# Altium PCB Current_Regulation.PcbDoc
Units mil, origin at the board's own origin, x right, y up, seen from the top; angles counter-clockwise.
Board outline 2283.46 x 2913.39 mil, 2 copper layers (Top Layer, Bottom Layer); 16 components, 23 nets, 55 pads, 2 vias.
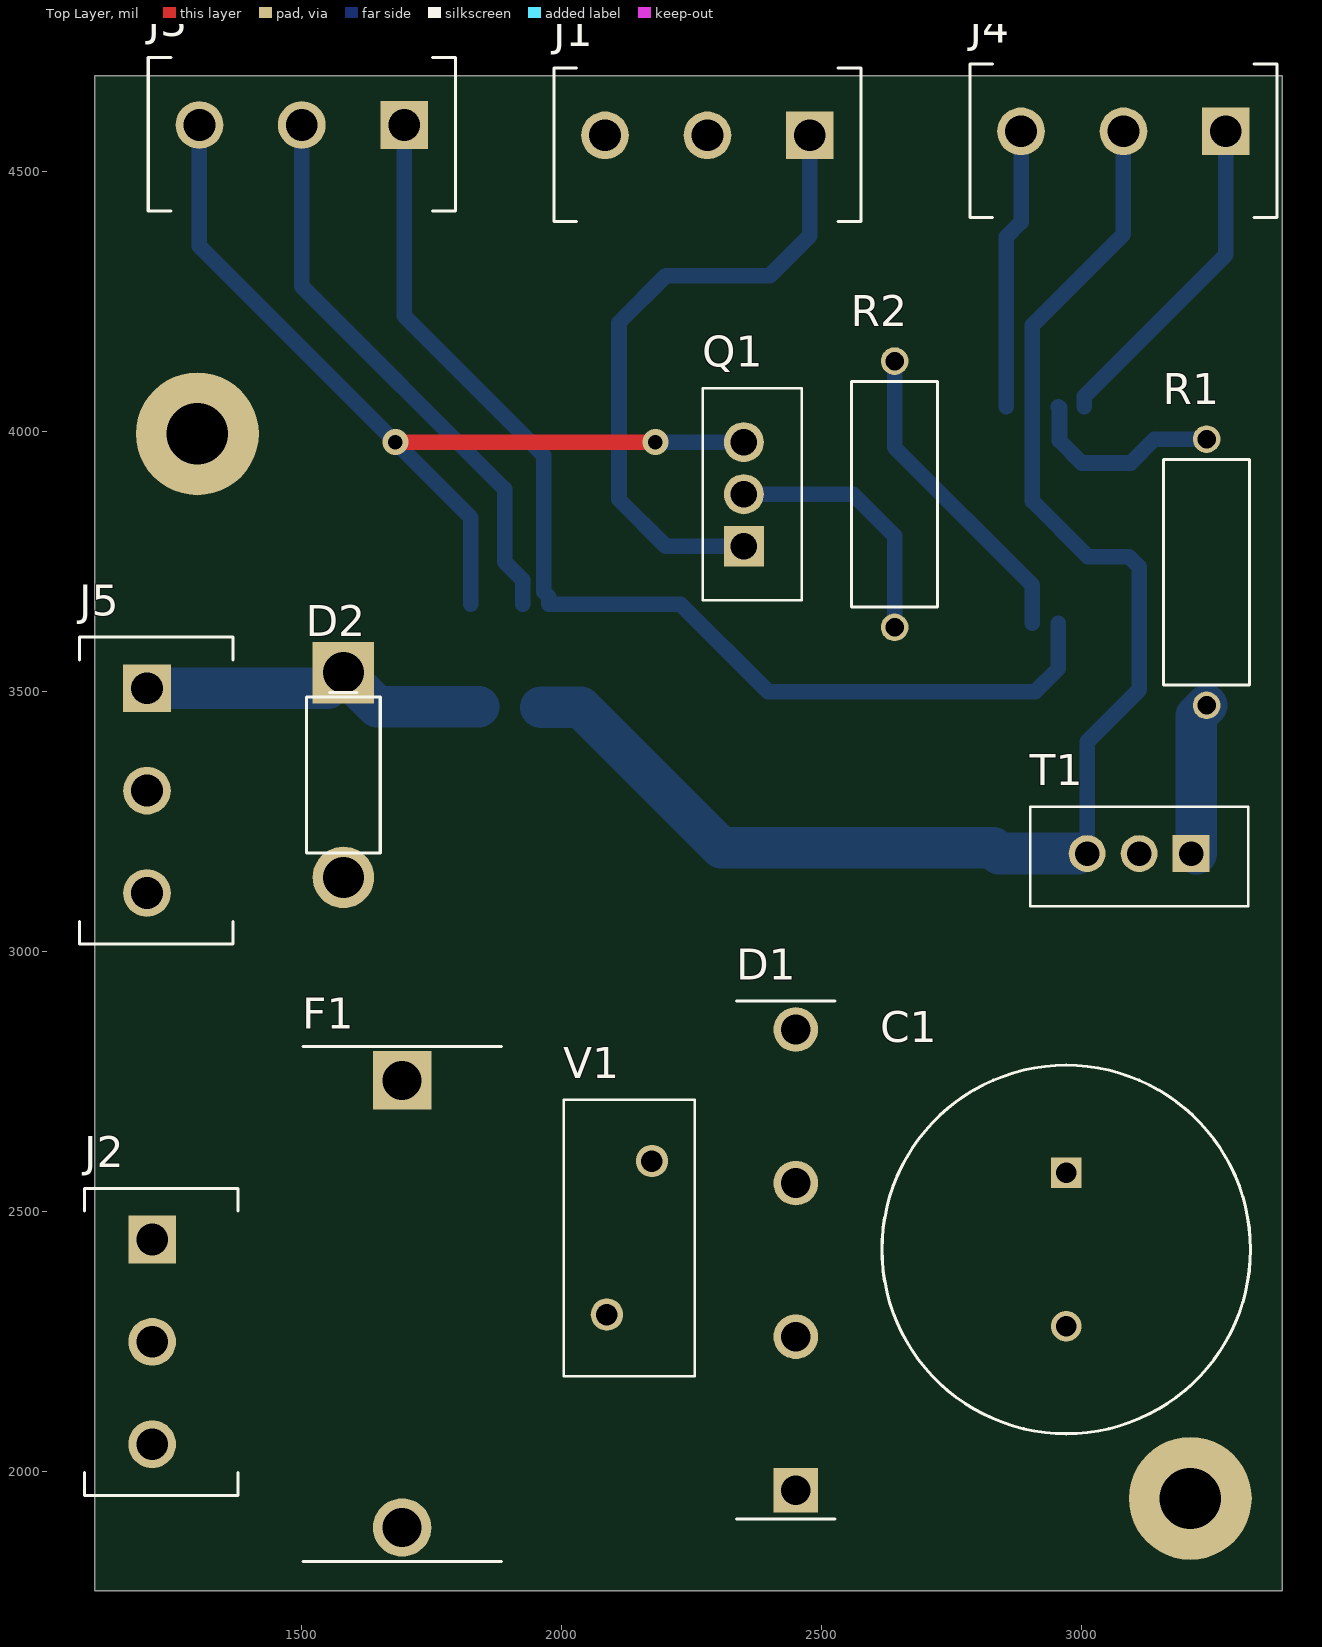
[diagram p0: Top Layer view]
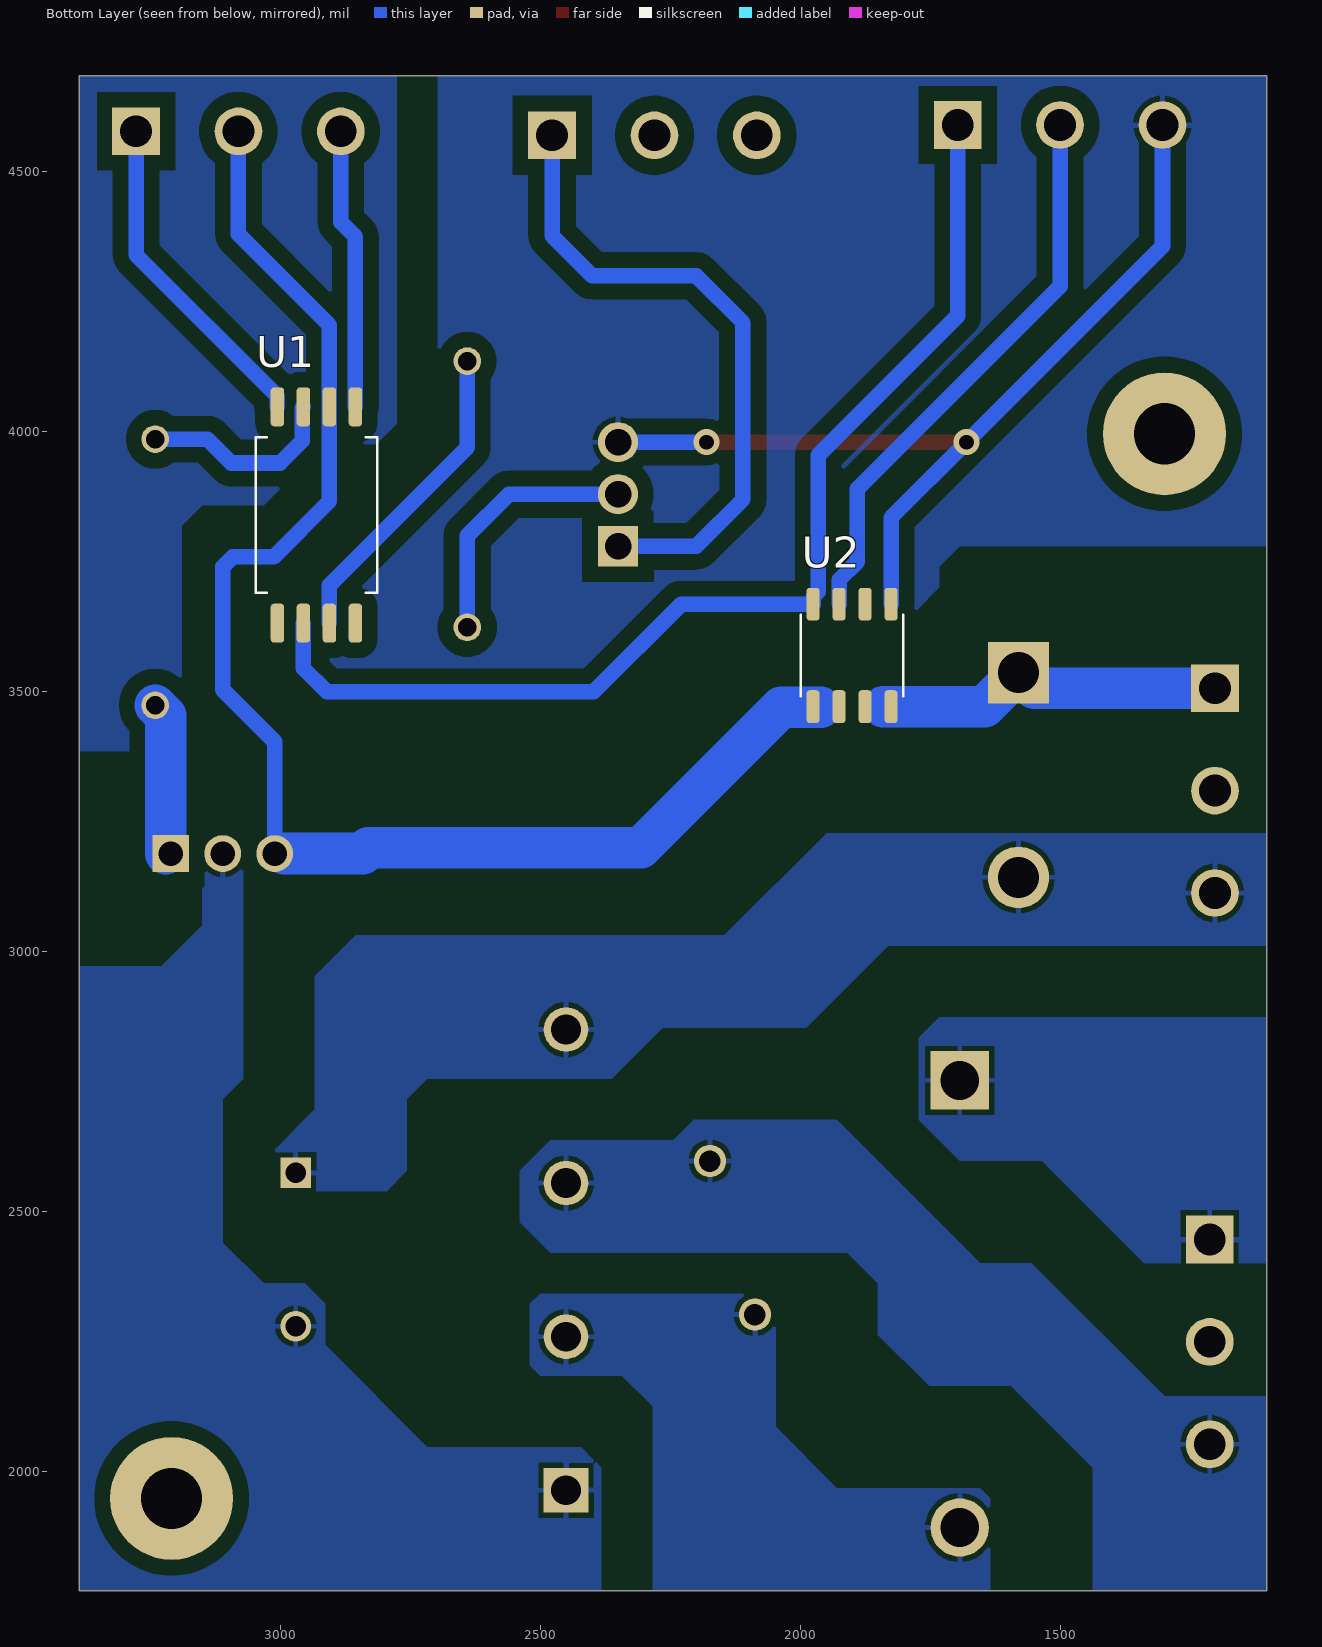
[diagram p1: Bottom Layer view, seen from below]
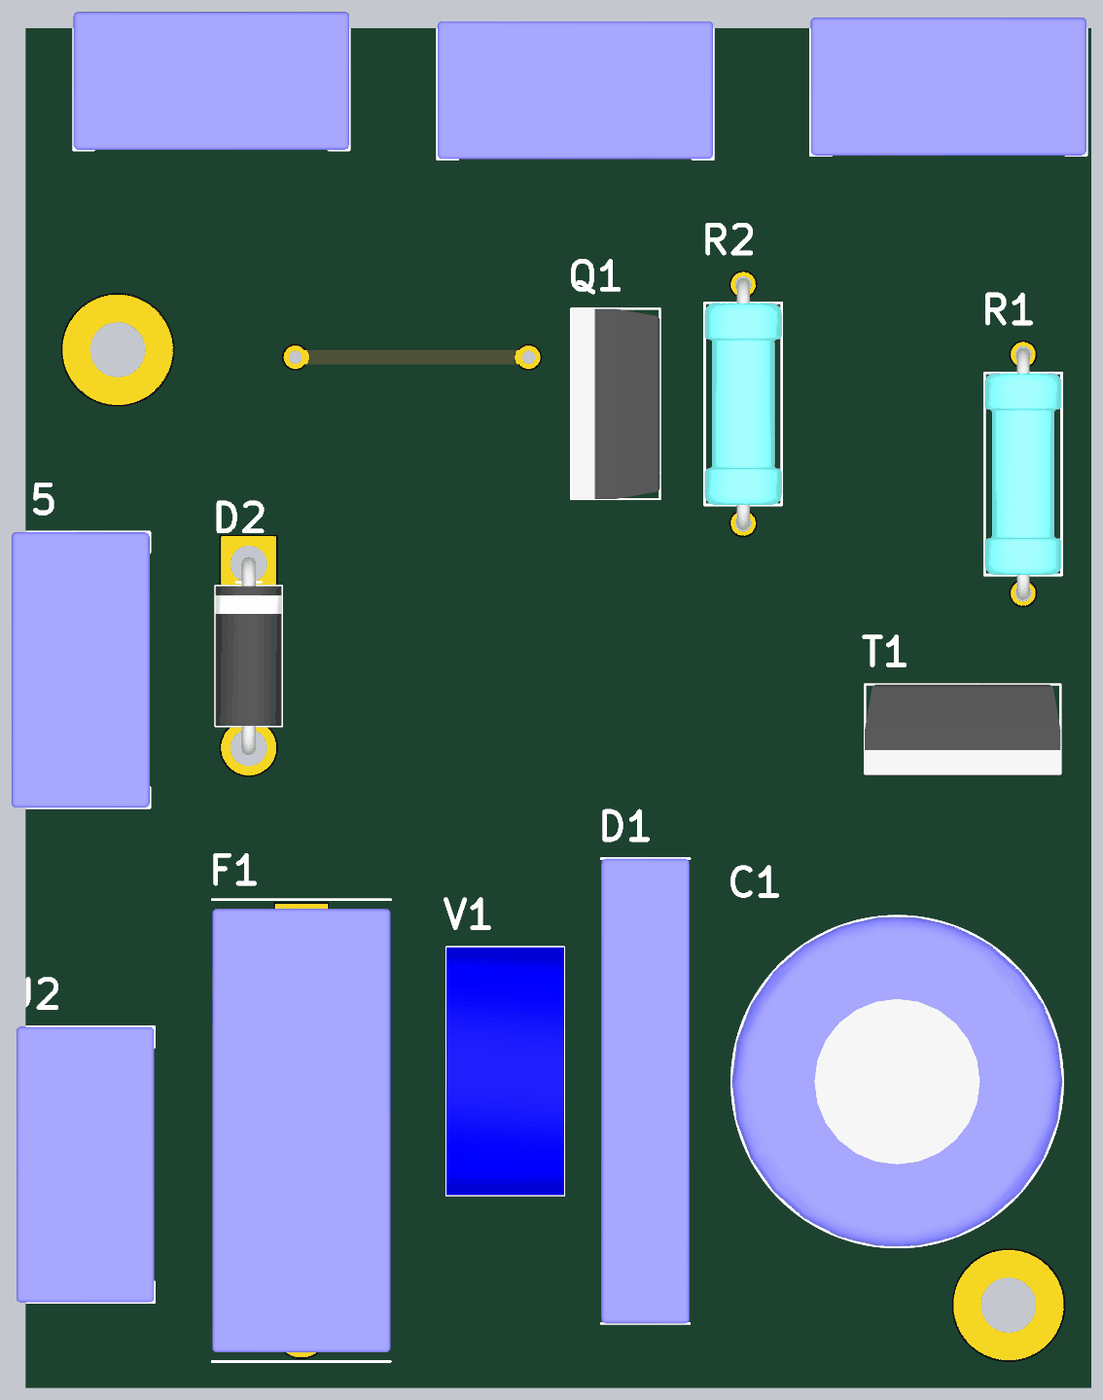
[diagram p2: 3D render of the assembled board from above, using the file's embedded part models]

## Layer stack, top to bottom
Top Solder: solder mask 0.4, Solder Resist, Dk 3.5
Top Layer: signal copper 1.4
Dielectric 1: dielectric 12.6, FR-4, Dk 4.8
Bottom Layer: signal copper 1.4
Bottom Solder: solder mask 0.4, Solder Resist, Dk 3.5

## Board outline
1102.36,1771.65 1102.36,4685.04 3385.83,4685.04 3385.83,1771.65

## Design rules (kind name [scope] priority, off if disabled: settings)
Clearance [All] p1: gap=30 ignorepadtopadclearanceinfootprint=FALSE except(0: Arc-Hole Track-Hole SMDPad-Hole THPad-Hole Via-Hole Text-Hole; 10: Arc-Arc Arc-Track Arc-SMDPad Arc-THPad Arc-Via Arc-Text Track-Track Track-SMDPad Track-THPad Track-Via Track-Text SMDPad-SMDPad SMDPad-THPad SMDPad-Via SMDPad-Text THPad-THPad THPad-Via THPad-Text Via-Via Via-Text Text-Text)
PolygonConnect [All] p1: connectstyle=Relief reliefconductorwidth=10 reliefentries=4 polygonreliefangle="90 Angle" airgapwidth=10
RoutingVias [All] p1: holewidth=28 width=50 viastyle="Through Hole" minholewidth=28 minwidth=50 maxholewidth=28 maxwidth=50
SolderMaskExpansion [All] p1: expansion=4 istentingtop=FALSE
Width [All] p1: maxlimit=80 minlimit=7 preferedwidth=10
30 further rules are at their usual default settings.

## Classes and differential pairs
component class Simulation: C2 D3 D? L1 M1 R3 V2 V3

## Components (designator, comment, footprint, x,y, rotation, side; value= is the part's Value field where it differs from the comment)
C1 "Capacitor-P" C-P-400V 2970,2427.64 r270 top value=47uF
D1 "KBJ2010_T0_00601" SIP480W100P750L2530H1340Q4 2430.32,2407.64 r90 top
D2 "Diode" Diode-6A 1580,3340 r270 top
F1 "Fuse" FuseHolder 1692.91,2322.83 r270 top value="Fuse holder"
J1 "Molex Micro-Latch" ScrewTerminal 2280,4552.28 r180 top
J2 "Molex Micro-Latch" ScrewTerminal 1230,2250 r270 top
J3 "Molex Micro-Latch" ScrewTerminal 1500,4572.28 r180 top
J4 "Molex Micro-Latch" ScrewTerminal 3080,4560 r180 top
J5 "Molex Micro-Latch" ScrewTerminal 1220,3310 r270 top
Q1 "=Value" MOSFET 2350,3780 r90 top
R1 "1k" R-2W 3240,3730 r90 top
R2 "120Ohm" R-2W 2640,3880 r270 top
T1 "IKA08N65ET6XKSA1" TO254P1065X485X2200-3 3210.24,3188.98 r180 top
U1 "UCC23514EDWVR" SOIC8P127_585X1150X280L75X41N 2930,3840 r180 bottom
U2 "TMCS1108A3BQDT" SOIC8P127_490X599X200L104X41N 1900,3570 r180 bottom
V1 "Varistor" VARRBO750W80L1350T640H1650 2130,2450 r270 top

## Footprints (in the part's own frame and the unit in brackets; to place one, negate y for a bottom-side part, rotate by r counter-clockwise, add the part's x,y. Pads: shape width x height; smd on the part's side, far side on the other; paste and mask are expansions set on the pad)
C-P-400V [mm] "Capacitor, Polarized, Radial (Electrolytic); 7.50 mm Pitch X 18.00 mm Dia X 20.00 mm H body"
  rect 1.5x1.5 / inner round 1.5 / far side rect 1.5x1.5 hole 1 paste-1.5: 1(-3.75,0)
  round 1.5 hole 1 paste-1.5: 2(3.75,0)
  silkscreen extent -9,-9 9,9, body extent -9,-9 9.01,9, height 20.01
Diode-6A [mm] "Diode, Axial; 10.00 mm Pitch X 0.75 mm W 7.60 mm L X 5.00 mm Dia. body"
  round 3 hole 2 paste-1.5: A(5,0)
  rect 3x3 / inner round 3 / far side rect 3x3 hole 2 paste-1.5: C(-5,0)
  silkscreen extent -4.03,-1.8 3.8,1.8, body extent -5.38,-1.81 5.38,1.81, height 5.01
FuseHolder [mm] "SIP, 21.84 mm pitch; 2 pin, 24.16 mm L X 9.70 mm W X 11.00 mm H body"
  rect 2.85x2.85 / inner round 2.85 / far side rect 2.85x2.85 hole 1.9 paste-2.85: 1(-10.92,0)
  round 2.85 hole 1.9 paste-2.85: 2(10.92,0)
  silkscreen extent -12.57,-4.85 12.57,4.85, body extent -12.08,-4.85 12.08,4.85, height 11
MOSFET [mm] "Flange Mount (TO) Vertical, 2.54 mm pitch; 3 pin, 10.36 mm W X 4.83 mm H X 19.65 mm mounted height"
  rect 1.96x1.96 / inner round 1.96 / far side rect 1.96x1.96 hole 1.3 paste-1.96: 1(0,0)
  round 1.96 hole 1.3 paste-1.96: 2(2.54,0) 3(5.08,0)
  silkscreen extent -2.64,-2.83 7.72,2, body extent -2.64,-2.83 7.72,2, height 19.65
R-2W [mm] "Resistor, Axial; 13.00 mm Pitch X 0.70 mm W 11.00 mm L X 6.00 mm Dia. body"
  round 1.35 hole 0.9 paste-1.35: 1(-6.5,0) 2(6.5,0)
  silkscreen extent -5.5,-2.1 5.5,2.1, body extent -6.85,-2.1 6.85,2.1, height 6
ScrewTerminal [mm] "SIP, 5.00 mm pitch; 3 pin, 15.00 mm L X 7.50 mm W X 10.00 mm H body"
  rect 2.33x2.33 / inner round 2.33 / far side rect 2.33x2.33 hole 1.55 paste-2.33: 1(-5,-0.45)
  round 2.33 hole 1.55 paste-2.33: 2(0,-0.45) 3(5,-0.45)
  silkscreen extent -7.5,-3.75 7.5,3.75, body extent -7.5,-3.75 7.5,3.75, height 10
SIP480W100P750L2530H1340Q4 [mm] "SIP, 7.50 mm pitch; 4 pin, 25.30 mm L X 4.80 mm W X 13.40 mm H body"
  rect 2.18x2.18 / inner round 2.18 / far side rect 2.18x2.18 hole 1.45 paste-2.18: 1(-11.25,-0.5)
  round 2.18 hole 1.45 paste-2.18: 2(11.25,-0.5) 3(-3.75,-0.5) 4(3.75,-0.5)
  silkscreen extent -12.65,-2.4 12.65,2.4, body extent -12.65,-2.4 12.65,2.4, height 13.4
SOIC8P127_490X599X200L104X41N [mil] "Small Outline IC (SOIC), 1.27 mm pitch; 8 pin, 4.905 mm L X 3.895 mm W X 2.00 mm H body"
  rrect50% 25.16x63.03 smd: 1(-75,-98.5) 2(-25,-98.5) 3(25,-98.5) 4(75,-98.5) 5(75,98.5) 6(25,98.5) 7(-25,98.5) 8(-75,98.5)
  silkscreen extent -98,-78 98,78, body extent -97,-118 97,118, height 79
SOIC8P127_585X1150X280L75X41N [mil] "Small Outline IC (SOIC), 1.27 mm pitch; 8 pin, 5.85 mm L X 7.50 mm W X 2.80 mm H body"
  rrect50% 25.94x74.84 smd: 1(-75,-207.91) 2(-25,-207.91) 3(25,-207.91) 4(75,-207.91) 5(75,207.91) 6(25,207.91) 7(-25,207.91) 8(-75,207.91)
  silkscreen extent -117,-150 117,150, body extent -115,-226 115,226, height 110
TO254P1065X485X2200-3 [mm] "Flange Mount (TO) Vertical, 2.54 mm pitch; 3 pin, 10.65 mm W X 4.85 mm H X 22.00 mm mounted height"
  rect 1.8x1.8 / inner round 1.8 / far side rect 1.8x1.8 hole 1.2 paste-1.8: 1(0,0)
  round 1.8 hole 1.2 paste-1.8: 2(2.54,0) 3(5.08,0)
  silkscreen extent -2.79,-2.28 7.87,2.57, body extent -2.79,-2.28 7.87,2.57, height 22
VARRBO750W80L1350T640H1650 [mm] "Varistor, Radial (Disk with Offset Leads), 7.50 mm Pitch X 0.80 mm W X 13.50 mm L X 6.40 mm T X 16.50 mm H body"
  round 1.58 hole 1.05 paste-1.58: 1(-3.75,1.1) 2(3.75,-1.1)
  silkscreen extent -6.75,-3.2 6.75,3.2, body extent -6.75,-3.2 6.75,3.2, height 16.5

## Part data
D1: Diode Case Style=KBJ-2, Forward Current=20A, Max Reverse Voltage=1kV, Supplier Part Number=241-KBJ2010_T0_00601, ComponentLinkDescription=Datasheet, ComponentLinkURL=https://hr.mouser.com/datasheet/2/1057/KBJ2010-2999227.pdf, Diode Type="Bridge rectifier", FR_SN=D-07, Manufacturer Part Number=KBJ2010_T0_00601, Part Number=KBJ2010_T0_00601, Reverse Recovery Time=-
F1: library part F_30A, FR_SN=F-04, Part Number=F_30A
J1 J2 J3 J4 J5: library part "Molex Micro-Latch 1x3", Manufacturer Part Number=53254-0370, Supplier Part Number=538-53254-0370, ComponentLinkDescription=Datasheet, ComponentLinkURL=https://hr.mouser.com/datasheet/2/276/0532540370_PCB_HEADERS-171041.pdf, FR_SN=J-13, Part Number="Molex Micro-Latch 1x3"
Q1: library part MOSFET
R1 R2: library part Resistor
T1: Continuous Drain Current Id="11 A", Drain Source Voltage Uds="1.5 V", On Resistance Rds(on)=-, Power Dissipation Pd="33 W", Supplier Part Number=726-IKA08N65ET6XKSA1, Transistor Case Style=TO-220FP-3, ComponentLinkDescription=Datasheet, ComponentLinkURL=https://hr.mouser.com/datasheet/2/196/Infineon_IKA08N65ET6_DataSheet_v01_00_EN-1731522.pdf, FR_SN=T_M-16, Manufacturer Part Number=IKA08N65ET6XKSA1, Part Number=IKA08N65ET6XKSA1
U1: IC Case Style=SOIC-8, Supplier Part Number=595-UCC23514EDWVR, Category="MOSFET/IGBT gate driver", ComponentLinkDescription=Datasheet, ComponentLinkURL=https://www.ti.com/general/docs/suppproductinfo.tsp?distId=26&gotoUrl=https://www.ti.com/lit/gpn/ucc23514, FR_SN=IC_D-18, Manufacturer Part Number=UCC23514EDWVR, Part Number=UCC23514EDWVR
U2: IC Case Style=SOIC-8, Supplier Part Number=595-TMCS1108A3BQDT, Category="Current Sensor", ComponentLinkDescription=Datasheet, ComponentLinkURL=www.ti.com/lit/ds/symlink/tmcs1108.pdf?HQS=dis-mous-null-mousermode-dsf-pf-null-wwe&ts=1664483891528&ref_url=https%253A%252F%252Fpt.mouser.com%252F, FR_SN=U_Analog-21, Manufacturer Part Number=TMCS1108A3BQDT, Part Number=TMCS1108A3BQDT
V1: library part B72314S2351K101, FR_SN=Var-01, Part Number=B72314S2351K101

## Free pads (board coordinates)
  round 236.22 hole 118.11: 1(1299.21,3996.06) 2(3208.66,1948.82)

## Via types
v1: diameter 50, hole 28, Top Layer to Bottom Layer, 2 vias

## Nets (pads, with @x,y where several pads share a name; then routed paths per layer and width w, separated by ;. In a path a pad name is that pad's centre, name@x,y a point inside that pad or via, vN(x,y) a via of type N, cw(c..) or ccw(c..) an arc to the next point about the centre after c; other vN are vias at no path point)
3V3: J3.1 U1.2 U2.8 | length 2192.2
  Bottom Layer w30: J3.1 1696.85,4223.15 1965,3955 1965,3692.6 1975,3682.6 U2.8 2228.5,3668.5 2397.01,3500 2910,3500 2955,3545 U1.2
+15V_IGBT: J4.1 U1.8 | length 642.4
  Bottom Layer w30: U1.8 3005,4068.31 3276.85,4340.16 J4.1
-8V_IGBT: J4.3 U1.5 | length 541.5
  Bottom Layer w30: U1.5 2855,4375 2883.15,4403.15 J4.3
CurrentSense: J3.2 U2.7 | length 1097.5
  Bottom Layer w30: J3.2 1500,4280 1890,3890 1890,3750 1925,3715 U2.7
GateControl: J1.1 Q1.1 | length 1246.4
  Bottom Layer w30: Q1.1 2200,3780 2110,3870 2110,4210 2200,4300 2400,4300 2476.85,4376.85 J1.1
GND: J3.3 Q1.3 U2.5 | length 1807.7
  Top Layer w30: v1(1680,3980) v1(2180,3980)
  Bottom Layer w30: J3.3 1303.15,4356.85 v1(1680,3980) 1825,3835 U2.5 ; v1(2180,3980) Q1.3
GND_HV: C1.1 D1.2 D2.A J5.3
GND_IGBT: J4.2 T1.3 U1.6 U2.1 U2.2 | length 2782.3
  Bottom Layer w30: T1.3 3010.24,3403.94 3110.24,3503.94 3110.24,3740.16 3090.55,3759.84 3011.81,3759.84 2905,3866.65 U1.6 2905,4205 3080,4380 J4.2
  Bottom Layer w80: 1960,3470 2036.5,3470 2306.5,3200 2830,3200 2841.02,3188.98 T1.3@2992.13,3188.98
Line: F1.1 J2.1
NetC1_2: C1.2 D1.1 T1.2
NetD1_3: D1.3 F1.2 V1.2
NetD2_C: D2.C J5.1 U2.3 U2.4 | length 677.2
  Bottom Layer w80: J5.1 1550,3506.85 D2.C 1645.35,3471.5 U2.4 1840,3471.5
NetD3_2: 
NetL1_2: 
NetM1_2: 
NetQ1_2: Q1.2 R2.2 | length 499
  Bottom Layer w30: Q1.2 2560,3880 2640,3800 R2.2
NetR1_1: R1.1 T1.1 | length 293.4
  Bottom Layer w80: T1.1@3220,3188.98 3220,3454.09 R1.1
NetR1_2: R1.2 U1.7 | length 385.6
  Bottom Layer w30: U1.7 2957.03,4045.89 2957.03,3982.97 3000,3940 3093.92,3940 3139.82,3985.91 R1.2
NetR2_1: R2.1 U1.3 | length 613.6
  Bottom Layer w30: R2.1 2640,3970 2905,3705 U1.3
Neutral: D1.4 J2.3 V1.1
Vfilt: 
Vin+: 
Vin-: 
pads on no net: J1.2 J1.3 J2.2 J5.2 U1.1 U1.4 U2.6

## Polygon pours and split planes (outlines as drawn)
no net on Bottom Layer "NONET_L02_P001" (solid, pour order 1): 3031.5,3858.27 3149.61,3858.27 3188.98,3818.9 3188.98,3385.83 3385.83,3385.83 3385.83,4685.04 2775.59,4685.04 2775.59,4015.75 2814.96,3976.38 2913.39,3976.38
GND on Bottom Layer "GND_L02_P000" (solid, pour order 0): 1102.36,4685.04 1102.36,3779.53 1692.91,3779.53 1732.28,3740.16 1732.28,3700.79 1791.34,3641.73 2224.41,3641.73 2381.89,3484.25 2933.07,3484.25 3031.5,3582.68 3031.5,3700.79 3011.81,3720.47 2933.07,3720.47 2696.85,3956.69 2696.85,4685.04
Neutral on Bottom Layer "NEUTRAL_L02_P006" (solid, pour order 6): 1102.36,1771.65 1437.01,1771.65 1437.01,2007.87 1594.49,2165.35 1751.97,2165.35 1850.39,2263.78 1850.39,2362.2 1909.45,2421.26 2480.31,2421.26 2539.37,2480.32 2539.37,2578.74 2480.32,2637.8 2244.09,2637.8 2204.72,2677.17 1929.13,2677.17 1653.54,2401.57 1555.12,2401.57 1299.21,2145.67 1102.36,2145.67
Line on Bottom Layer "LINE_L02_P005" (solid, pour order 5): 1102.36,2401.57 1338.58,2401.57 1535.43,2598.43 1692.91,2598.43 1771.65,2677.17 1771.65,2834.65 1732.28,2874.02 1102.36,2874.02
NetD1_3 on Bottom Layer "NETD1_3_L02_P004" (solid, pour order 4): 1633.86,1771.65 1633.86,1948.82 1653.54,1968.5 1929.13,1968.5 2047.24,2086.61 2047.24,2322.83 2066.93,2342.52 2500,2342.52 2519.68,2322.83 2519.68,2204.72 2500,2185.04 2342.52,2185.04 2283.46,2125.98 2283.46,1771.65
GND_HV on Bottom Layer "GND_HV_L02_P003" (solid, pour order 3): 3011.81,2539.37 3011.81,2618.11 2933.07,2696.85 2933.07,2952.76 2854.33,3031.5 2145.67,3031.5 1948.82,3228.35 1102.36,3228.35 1102.36,3011.81 1830.71,3011.81 1988.19,2854.33 2263.78,2854.33 2362.2,2755.91 2716.54,2755.91 2755.91,2716.54 2755.91,2578.74 2795.28,2539.37
NetC1_2 on Bottom Layer "NETC1_2_L02_P002" (solid, pour order 2): 3070.87,3208.66 3090.55,3228.35 3129.92,3228.35 3149.61,3208.66 3149.61,3051.18 3228.35,2972.44 3385.83,2972.44 3385.83,1771.65 2381.89,1771.65 2381.89,2007.87 2421.26,2047.24 2716.54,2047.24 2913.39,2244.09 2913.39,2322.83 2952.76,2362.2 3031.5,2362.2 3110.24,2440.94 3110.24,2716.54 3070.87,2755.91 3070.87,2834.65

## Silkscreen, mask and mechanical layers (free items; w line width, h text height)
Mechanical 1:
  lines w1: 1102.36,1771.65 3267.72,1771.65 3385.83,1771.65 3385.83,4685.04 1102.36,4685.04 1102.36,1771.65